# EAGLE board io_board (EAGLE 7.2.0)
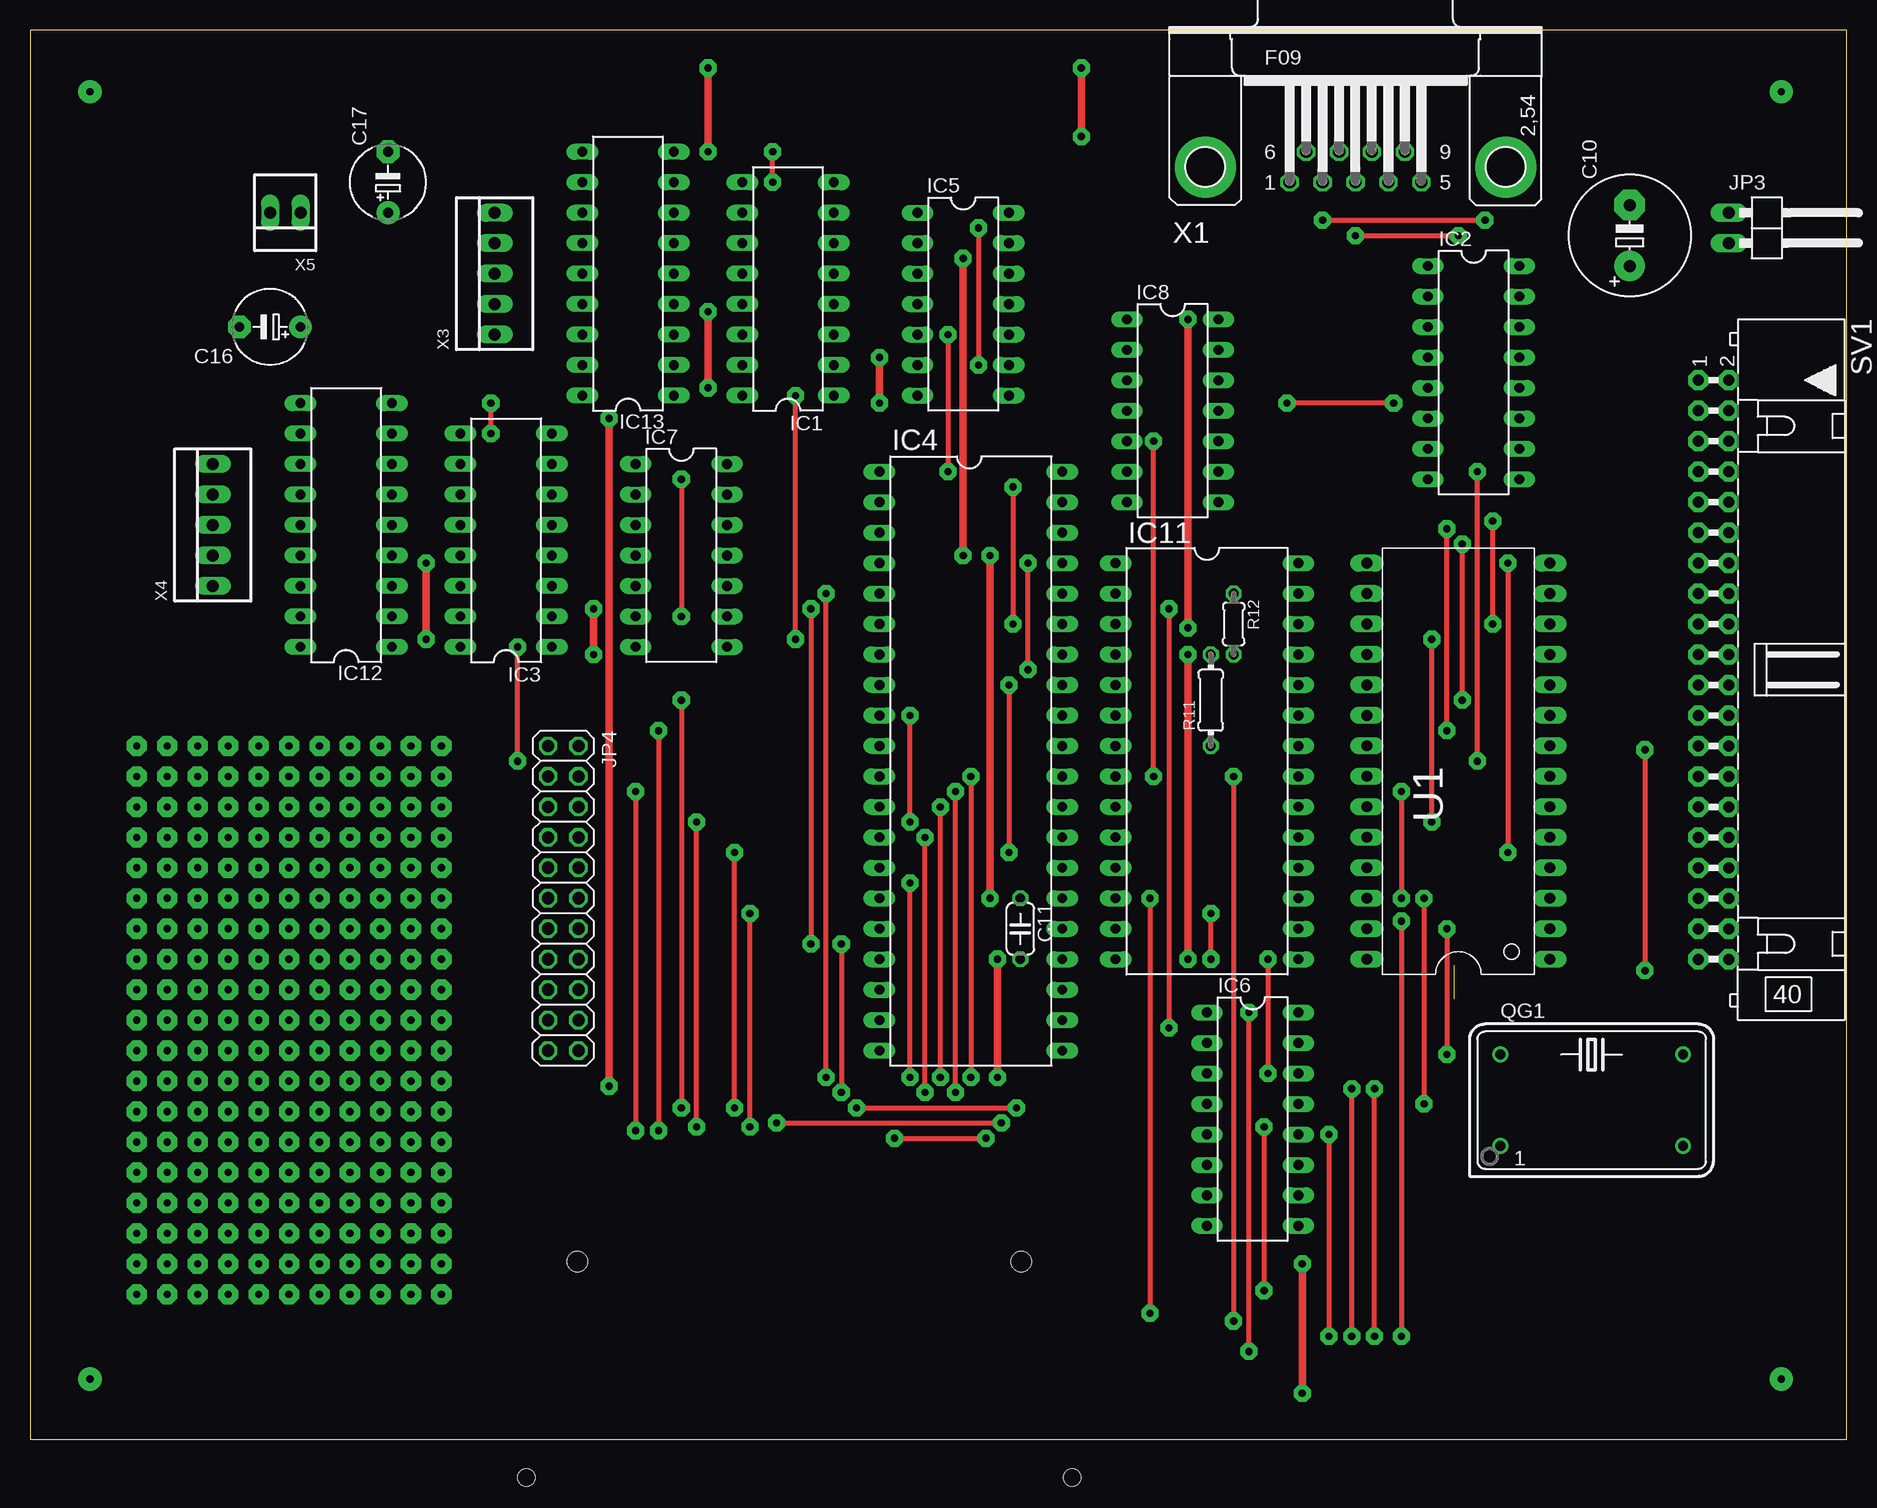
[diagram p0: board, top side]
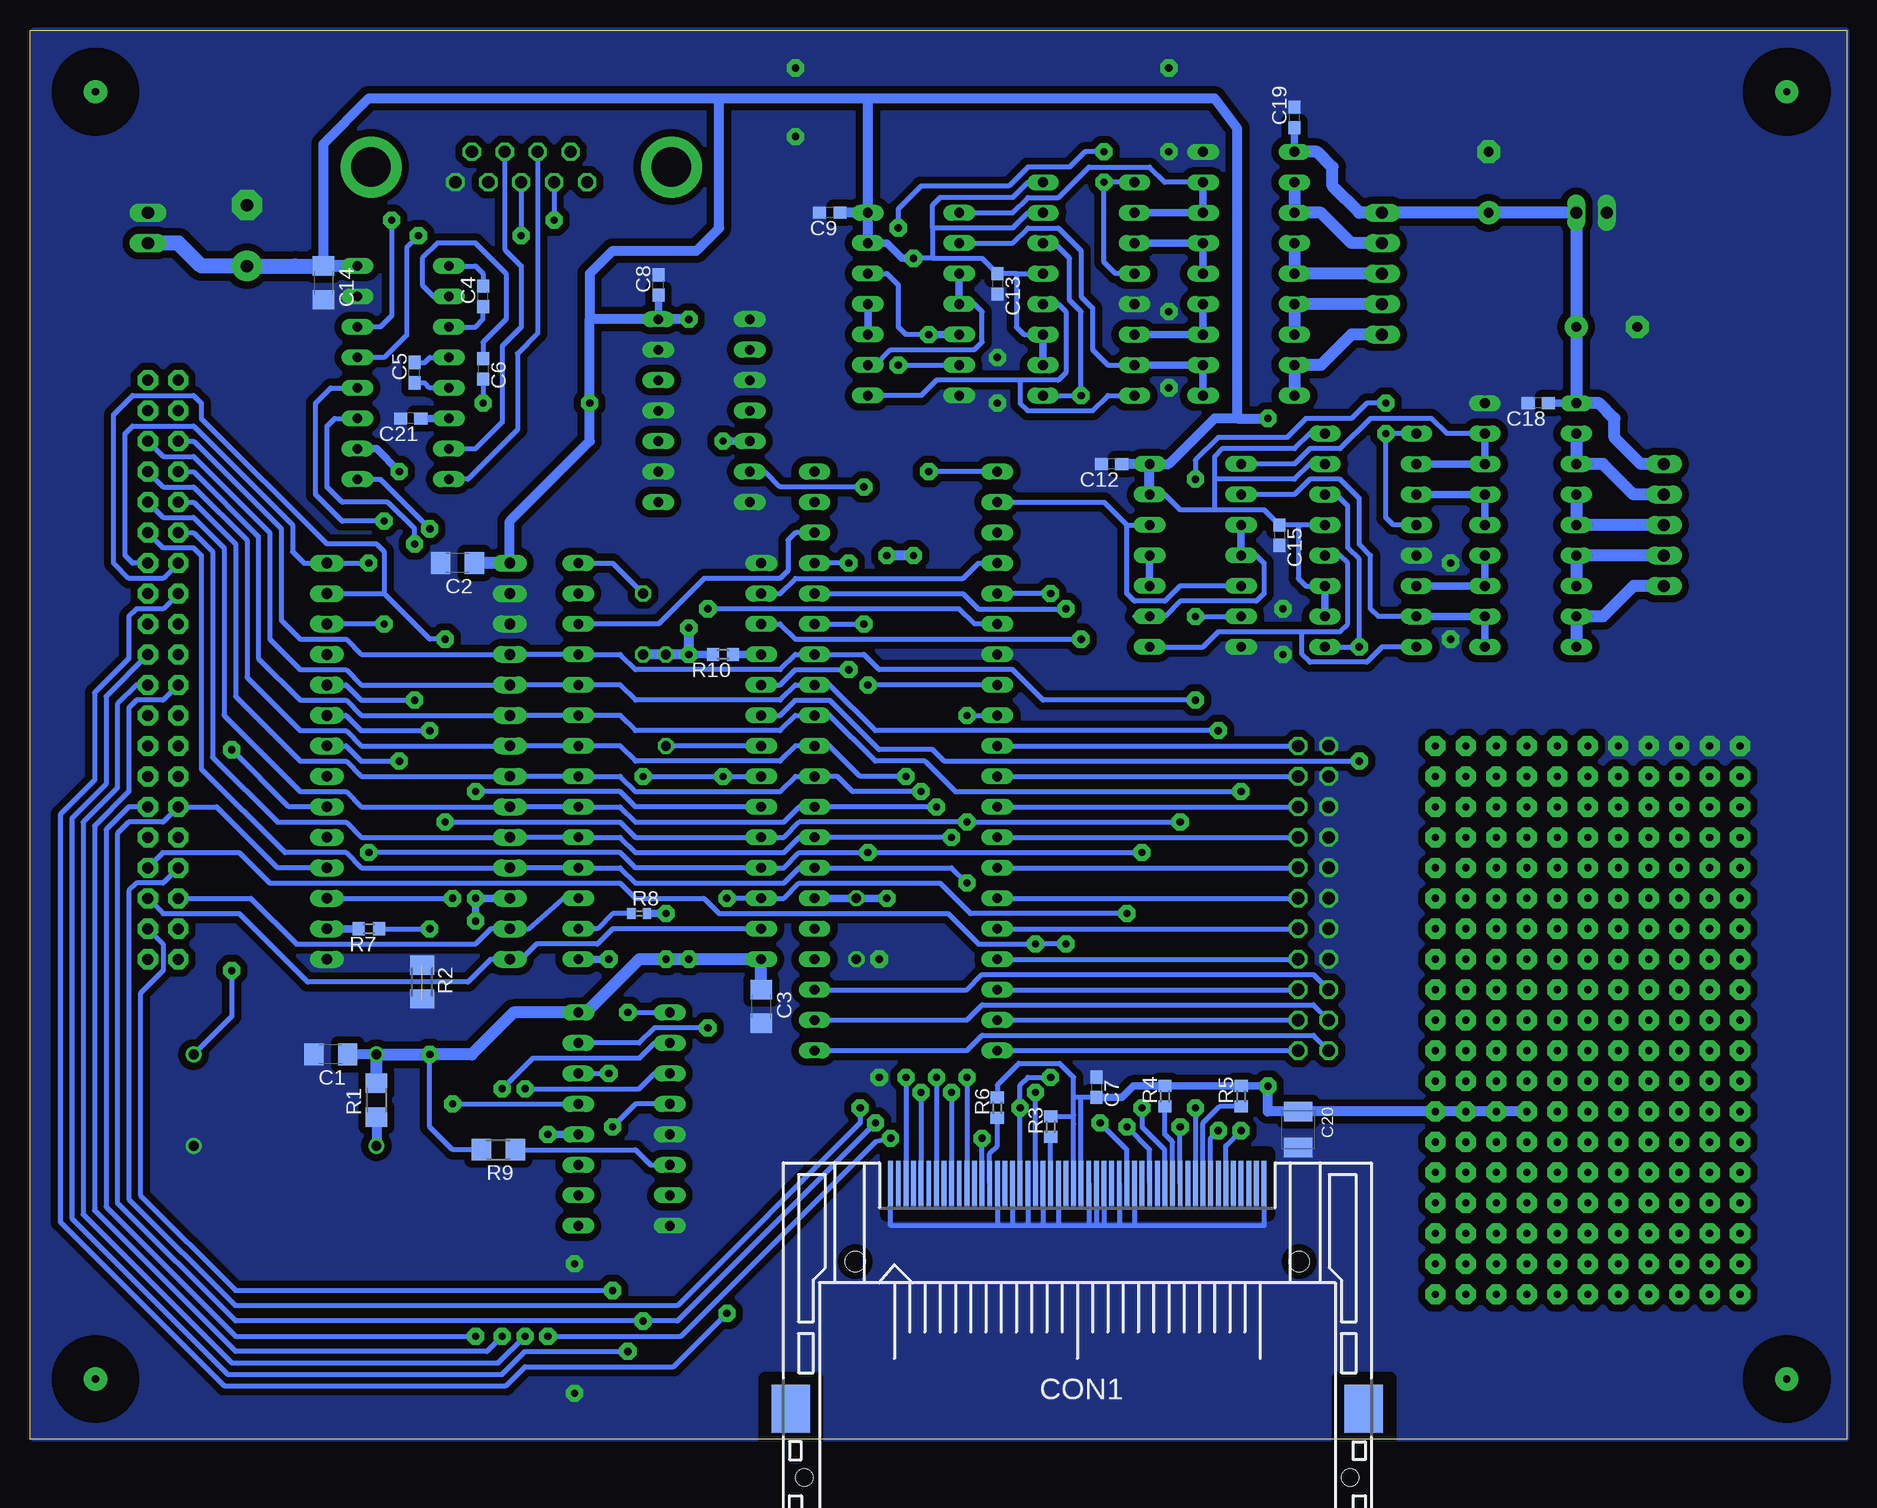
[diagram p1: board, bottom side, seen from below]

Size 151.44 x 117.47 mm. Coordinates in mm from the lower left corner, seen from the top.
Outline: 0,0 151.44,0 151.44,117.47 0,117.47 0,0
Copper layers (1*16): Top 0.035mm / dielectric 1.5mm / Bottom 0.035mm
Design rules "default *": minimum track width 10mil, minimum drill 24mil, track to track 8mil, track to pad 8mil, pad to pad 8mil, via to via 8mil, smd to smd 8mil, copper to edge 0mil, drill to drill 8mil, minimum pad ring 10mil, minimum via ring 8mil, stop-mask expansion 4mil, vias tented up to drill 0mil, thermal gap 10mil
bRestrict: area 2,2 to 8,8; area 2,109.3 to 8,115.4; area 142.9,2 to 149,8; area 142.9,109.3 to 149,115.4; area 48.3,18.7 to 80,23.8

## Footprints (pad centres in the part's own frame; a part is rotated, then mirrored left to right if it is on the bottom)
C1206 = smd 1.6 x 1.8: 1 -1.4,0; 2 1.4,0
C0603 = smd 1.1 x 1: 1 -0.85,0; 2 0.85,0
E5-10,5 = drill 1.016 pad 2.54: + -2.54,0 | drill 1.016 pad 2.54 octagon: - 2.54,0
C050-024X044 = drill 0.813 octagon: 1 -2.54,0; 2 2.54,0
E5-6 = drill 0.813 pad 1.905: + -2.54,0 | drill 0.813 pad 1.905 octagon: - 2.54,0
SMC_B = smd 1.6 x 2.4: + -1.5,0; - 1.5,0
MI20-50PD-SF = smd 0.41 x 3.75: 1 15.557,-18.78; 2 14.287,-18.78; 3 13.018,-18.78; 4 11.748,-18.78; 5 10.477,-18.78; 6 9.207,-18.78; 7 7.938,-18.78; 8 6.668,-18.78; 9 5.397,-18.78; 10 4.128,-18.78; 11 2.857,-18.78; 12 1.587,-18.78; 13 0.318,-18.78; 14 -0.953,-18.78; 15 -2.223,-18.78; 16 -3.493,-18.78; 17 -4.763,-18.78; 18 -6.032,-18.78; 19 -7.303,-18.78; 20 -8.572,-18.78; 21 -9.842,-18.78; 22 -11.113,-18.78; 23 -12.383,-18.78; 24 -13.652,-18.78; 25 -14.922,-18.78; 26 14.922,-18.78; 27 13.652,-18.78; 28 12.383,-18.78; 29 11.113,-18.78; 30 9.842,-18.78; 31 8.572,-18.78; 32 7.303,-18.78; 33 6.032,-18.78; 34 4.763,-18.78; 35 3.493,-18.78; 36 2.223,-18.78; 37 0.953,-18.78; 38 -0.318,-18.78; 39 -1.587,-18.78; 40 -2.857,-18.78; 41 -4.128,-18.78; 42 -5.397,-18.78; 43 -6.668,-18.78; 44 -7.938,-18.78; 45 -9.207,-18.78; 46 -10.477,-18.78; 47 -11.748,-18.78; 48 -13.018,-18.78; 49 -14.287,-18.78; 50 -15.557,-18.78 | smd 3.2 x 4: M1 -23.883,-0.005; M2 23.883,-0.005 | hole 1.676: 18.5,-12.25; -18.5,-12.25 | hole 1.422: -22.75,5.75; 22.75,5.75
DIL16 = drill 0.813 long: 1 -8.89,-3.81; 2 -6.35,-3.81; 3 -3.81,-3.81; 4 -1.27,-3.81; 5 1.27,-3.81; 6 3.81,-3.81; 7 6.35,-3.81; 8 8.89,-3.81; 9 8.89,3.81; 10 6.35,3.81; 11 3.81,3.81; 12 1.27,3.81; 13 -1.27,3.81; 14 -3.81,3.81; 15 -6.35,3.81; 16 -8.89,3.81
DIL40 = drill 0.813 long: 1 -24.13,-7.62; 2 -21.59,-7.62; 3 -19.05,-7.62; 4 -16.51,-7.62; 5 -13.97,-7.62; 6 -11.43,-7.62; 7 -8.89,-7.62; 8 -6.35,-7.62; 9 -3.81,-7.62; 10 -1.27,-7.62; 11 1.27,-7.62; 12 3.81,-7.62; 13 6.35,-7.62; 14 8.89,-7.62; 15 11.43,-7.62; 16 13.97,-7.62; 17 16.51,-7.62; 18 19.05,-7.62; 19 21.59,-7.62; 20 24.13,-7.62; 21 24.13,7.62; 22 21.59,7.62; 23 19.05,7.62; 24 16.51,7.62; 25 13.97,7.62; 26 11.43,7.62; 27 8.89,7.62; 28 6.35,7.62; 29 3.81,7.62; 30 1.27,7.62; 31 -1.27,7.62; 32 -3.81,7.62; 33 -6.35,7.62; 34 -8.89,7.62; 35 -11.43,7.62; 36 -13.97,7.62; 37 -16.51,7.62; 38 -19.05,7.62; 39 -21.59,7.62; 40 -24.13,7.62
DIL14 = drill 0.813 long: 1 -7.62,-3.81; 2 -5.08,-3.81; 3 -2.54,-3.81; 4 0,-3.81; 5 2.54,-3.81; 6 5.08,-3.81; 7 7.62,-3.81; 8 7.62,3.81; 9 5.08,3.81; 10 2.54,3.81; 11 0,3.81; 12 -2.54,3.81; 13 -5.08,3.81; 14 -7.62,3.81
DIL28 = drill 0.813 long: 1 -16.51,-7.62; 2 -13.97,-7.62; 3 -11.43,-7.62; 4 -8.89,-7.62; 5 -6.35,-7.62; 6 -3.81,-7.62; 7 -1.27,-7.62; 8 1.27,-7.62; 9 3.81,-7.62; 10 6.35,-7.62; 11 8.89,-7.62; 12 11.43,-7.62; 13 13.97,-7.62; 14 16.51,-7.62; 15 16.51,7.62; 16 13.97,7.62; 17 11.43,7.62; 18 8.89,7.62; 19 6.35,7.62; 20 3.81,7.62; 21 1.27,7.62; 22 -1.27,7.62; 23 -3.81,7.62; 24 -6.35,7.62; 25 -8.89,7.62; 26 -11.43,7.62; 27 -13.97,7.62; 28 -16.51,7.62
DIL18 = drill 0.813 long: 1 -10.16,-3.81; 2 -7.62,-3.81; 3 -5.08,-3.81; 4 -2.54,-3.81; 5 0,-3.81; 6 2.54,-3.81; 7 5.08,-3.81; 8 7.62,-3.81; 9 10.16,-3.81; 10 10.16,3.81; 11 7.62,3.81; 12 5.08,3.81; 13 2.54,3.81; 14 0,3.81; 15 -2.54,3.81; 16 -5.08,3.81; 17 -7.62,3.81; 18 -10.16,3.81
1X02/90 = drill 1.016 long: 1 -1.27,-3.81; 2 1.27,-3.81
2X11 = drill 1.016 octagon: 1 -12.7,-1.27; 2 -12.7,1.27; 3 -10.16,-1.27; 4 -10.16,1.27; 5 -7.62,-1.27; 6 -7.62,1.27; 7 -5.08,-1.27; 8 -5.08,1.27; 9 -2.54,-1.27; 10 -2.54,1.27; 11 0,-1.27; 12 0,1.27; 13 2.54,-1.27; 14 2.54,1.27; 15 5.08,-1.27; 16 5.08,1.27; 17 7.62,-1.27; 18 7.62,1.27; 19 10.16,-1.27; 20 10.16,1.27; 21 12.7,-1.27; 22 12.7,1.27
DIL14S = drill 0.813: 1 -7.62,-3.81; 7 7.62,-3.81; 8 7.62,3.81; 14 -7.62,3.81
R1206 = smd 1.6 x 1.803: 1 -1.422,0; 2 1.422,0
M1206 = smd 1.6 x 2: 1 -1.4,0; 2 1.4,0
R0603 = smd 1 x 1.1: 1 -0.85,0; 2 0.85,0
R0402 = smd 0.7 x 0.9: 1 -0.65,0; 2 0.65,0
0204/7 = drill 0.813 octagon: 1 -3.81,0; 2 3.81,0
0204/5 = drill 0.813 octagon: 1 -2.54,0; 2 2.54,0
ML40L = drill 0.914 pad 1.676 octagon: 1 -24.13,-1.27; 2 -24.13,1.27; 3 -21.59,-1.27; 4 -21.59,1.27; 5 -19.05,-1.27; 6 -19.05,1.27; 7 -16.51,-1.27; 8 -16.51,1.27; 9 -13.97,-1.27; 10 -13.97,1.27; 11 -11.43,-1.27; 12 -11.43,1.27; 13 -8.89,-1.27; 14 -8.89,1.27; 15 -6.35,-1.27; 16 -6.35,1.27; 17 -3.81,-1.27; 18 -3.81,1.27; 19 -1.27,-1.27; 20 -1.27,1.27; 21 1.27,-1.27; 22 1.27,1.27; 23 3.81,-1.27; 24 3.81,1.27; 25 6.35,-1.27; 26 6.35,1.27; 27 8.89,-1.27; 28 8.89,1.27; 29 11.43,-1.27; 30 11.43,1.27; 31 13.97,-1.27; 32 13.97,1.27; 33 16.51,-1.27; 34 16.51,1.27; 35 19.05,-1.27; 36 19.05,1.27; 37 21.59,-1.27; 38 21.59,1.27; 39 24.13,-1.27; 40 24.13,1.27
DIP-28 = drill 0.889 long: 1 -15.24,-7.62; 2 -12.7,-7.62; 3 -10.16,-7.62; 4 -7.62,-7.62; 5 -5.08,-7.62; 6 -2.54,-7.62; 7 0,-7.62; 8 2.54,-7.62; 9 5.08,-7.62; 10 7.62,-7.62; 11 10.16,-7.62; 12 12.7,-7.62; 13 15.24,-7.62; 14 17.78,-7.62; 15 17.78,7.62; 16 15.24,7.62; 17 12.7,7.62; 18 10.16,7.62; 19 7.62,7.62; 20 5.08,7.62; 21 2.54,7.62; 22 0,7.62; 23 -2.54,7.62; 24 -5.08,7.62; 25 -7.62,7.62; 26 -10.16,7.62; 27 -12.7,7.62; 28 -15.24,7.62
F09HP = drill 1.016 octagon: 1 -5.486,-1.27; 2 -2.743,-1.27; 3 0,-1.27; 4 2.743,-1.27; 5 5.486,-1.27; 6 -4.115,1.27; 7 -1.372,1.27; 8 1.372,1.27; 9 4.115,1.27 | drill 3.302 pad 5.08: G1 -12.522,0; G2 12.522,0
22-23-2051 = drill 1 long: 1 -5.08,0; 2 -2.54,0; 3 0,0; 4 2.54,0; 5 5.08,0
22-23-2021 = drill 1 long: 1 -1.27,0; 2 1.27,0

## Placement (x,y rotation side)
C1  [C1206]  126.36,32.07 180 bottom
C2  [C1206]  115.8,73.03 180 bottom
C3  [C1206]  90.49,36.07 270 bottom
C4  [C0603]  113.67,95.25 90 bottom
C5  [C0603]  119.38,88.9 90 bottom
C6  [C0603]  113.67,89.22 270 bottom
C7  [C0603]  62.55,29.32 270 bottom
C8  [C0603]  99.06,96.2 90 bottom
C9  [C0603]  84.77,102.23 180 bottom
C10  [E5-10,5]  133.35,100.33 90 top
C11  [C050-024X044]  82.55,42.55 270 top
C12  [C0603]  61.28,81.28 180 bottom
C13  [C0603]  70.8,96.3 270 bottom
C14  [C1206]  126.97,96.39 270 bottom
C15  [C0603]  47.31,75.35 270 bottom
C16  [E5-6]  20,92.71 180 top
C17  [E5-6]  29.84,104.78 90 top
C18  [C0603]  25.72,86.36 180 bottom
C19  [C0603]  46.04,110.17 90 bottom
C20  [SMC_B]  45.72,25.81 270 bottom
C21  [C0603]  119.7,85.09 180 bottom
CON1  [MI20-50PD-SF]  64.14,2.54 180 bottom
IC1  74HC76N  [DIL16]  63.18,95.89 90 top
IC2  MAX232  [DIL16]  120.33,88.9 270 top
IC3  74HC76N  [DIL16]  39.69,74.93 90 top
IC4  [DIL40]  78.42,56.52 270 top
IC5  7486N  [DIL14]  77.79,94.61 270 top
IC6  74HCT138N  [DIL16]  101.92,26.67 270 top
IC7  7486N  [DIL14]  54.29,73.66 270 top
IC8  74HCT04N  [DIL14]  95.25,85.72 270 top
IC11  [DIL28]  98.11,56.52 270 top
IC12  [DIL18]  26.35,76.2 90 top
IC13  [DIL18]  49.85,97.16 90 top
JP3  [1X02/90]  145.41,100.97 270 top
JP4  [2X11]  44.45,45.09 270 top
QG1  [DIL14S]  130.18,28.26 0 top
R1  [R1206]  122.56,28.26 90 bottom
R2  [M1206]  118.75,38.1 270 bottom
R3  [R0603]  66.36,26.04 90 bottom
R4  [R0603]  56.83,28.57 90 bottom
R5  [R0603]  50.48,28.57 90 bottom
R6  [R0603]  70.8,27.62 90 bottom
R7  [R0603]  123.19,42.55 180 bottom
R8  [R0402]  100.65,43.81 0 bottom
R9  [R1206]  112.39,24.13 180 bottom
R10  [R0603]  93.66,65.41 180 bottom
R11  [0204/7]  98.42,61.59 90 top
R12  [0204/5]  100.33,67.94 270 top
SV1  [ML40L]  140.34,64.14 270 top
U1  [DIP-28]  119.06,55.24 90 top
X1  [F09HP]  110.49,106.05 0 top
X3  22-23-2051  [22-23-2051]  38.73,97.16 90 top
X4  22-23-2051  [22-23-2051]  15.24,76.2 90 top
X5  22-23-2021  [22-23-2021]  21.27,102.23 180 top

## Library data of the parts
C1-C21 R1-R12 = rcl
CON1 = con-hirose; OC_FARNELL: unknown; OC_NEWARK: unknown
IC1 IC3 IC6 IC8 = 74xx-eu
IC2 = maxim; MF: MAXIM; MPN: MAX232ACPE+; OC_FARNELL: 9723773; OC_NEWARK: 68K4544
IC4 = micro-intel; OC_FARNELL: unknown; OC_NEWARK: unknown
IC5 IC7 = 74xx-us
IC11 = micro-motorola; OC_FARNELL: unknown; OC_NEWARK: unknown
IC12 IC13 = uln-udn
JP3 JP4 = pinhead
QG1 = crystal; OC_FARNELL: unknown; OC_NEWARK: unknown
SV1 = con-harting-ml; OC_FARNELL: unknown; OC_NEWARK: unknown
U1 = 65xxx
X1 = con-subd; OC_FARNELL: unknown; OC_NEWARK: unknown
X3 X4 = con-molex; MF: MOLEX; MPN: 22-23-2051; OC_FARNELL: 1462952; OC_NEWARK: 38C9178
X5 = con-molex; MF: MOLEX; MPN: 22-23-2021; OC_FARNELL: 1462926; OC_NEWARK: 25C3832

## Nets
8255_CS: IC4.6 IC6.15
A0: CON1.20 IC4.9 IC11.10 SV1.13 U1.13
A1: CON1.19 IC4.8 IC11.11 SV1.14 U1.14
A2: CON1.18 IC11.12 SV1.15
A3: SV1.16
A4: SV1.17
A5: SV1.18
A6: SV1.19
A7: IC6.1 SV1.20
A8: IC6.2 SV1.21
A9: IC6.3 SV1.22
A10: SV1.23
A11: SV1.24
A12: SV1.25
A13: SV1.26
A14: SV1.27
A15: SV1.28
CF_CS0: CON1.7 IC6.12
CS_0: SV1.37
CS_1: IC6.4 SV1.38
CS_2: SV1.39
CS_3: SV1.40
CS_4: SV1.32
D0: CON1.21 IC4.34 IC11.25 SV1.5 U1.18
D1: CON1.22 IC4.33 IC11.24 SV1.6 U1.19
D2: CON1.23 IC4.32 IC11.23 SV1.7 U1.20
D3: CON1.2 IC4.31 IC11.22 SV1.8 U1.21
D4: CON1.3 IC4.30 IC11.21 SV1.9 U1.22
D5: CON1.4 IC4.29 IC11.20 SV1.10 U1.23
D6: CON1.5 IC4.28 IC11.19 SV1.11 U1.24
D7: CON1.6 IC4.27 IC11.18 SV1.12 U1.25
DIR1: IC4.1 IC5.5 IC5.12
DIR2: IC4.2 IC7.5 IC7.12
FI2: IC11.17 SV1.35 U1.27
GATE1: IC4.38 IC11.26
GATE2: IC4.4 IC11.2
GATE3: IC4.37 IC11.5
GND: C1.2 C2.2 C3.2 C7.1 C8.2 C9.2 C10.- C11.2 C12.2 C13.2 C14.2 C15.2 C16.- C17.- C18.2 C19.2 C20.- C21.2 CON1.1 CON1.8 CON1.9 CON1.10 CON1.11 CON1.12 CON1.14 CON1.15 CON1.16 CON1.17 CON1.39 CON1.50 IC1.13 IC2.15 IC3.13 IC4.7 IC5.7 IC6.5 IC6.8 IC7.7 IC8.1 IC8.3 IC8.7 IC8.9 IC8.11 IC8.13 IC11.1 IC12.9 IC13.9 JP3.1 JP4.1 JP4.3 JP4.5 JP4.7 JP4.9 JP4.11 JP4.13 JP4.15 QG1.7 R2.1 R2.2 U1.1 U1.16 U1.17 X1.5 X5.2
IRQ: IC11.9 SV1.30 U1.26
MOT1_PHASE1: IC1.15 IC5.2 IC13.1 IC13.2
MOT1_PHASE2: IC1.14 IC13.3 IC13.4
MOT1_PHASE3: IC1.11 IC13.5 IC13.6
MOT1_PHASE4: IC1.10 IC5.1 IC13.7 IC13.8
MOT1_PHASE5: IC3.15 IC7.2 IC12.1 IC12.2
MOT1_PHASE6: IC3.14 IC12.3 IC12.4
MOT1_PHASE7: IC3.11 IC12.5 IC12.6
MOT1_PHASE8: IC3.10 IC7.1 IC12.7 IC12.8
N$1: IC2.11 U1.10
N$2: IC2.10 U1.8
N$3: IC2.12 U1.12
N$4: IC2.9 U1.9
N$5: QG1.1 R1.1
N$6: IC2.13 X1.3
N$7: IC2.7 X1.8
N$8: IC2.8 X1.7
N$9: C4.2 IC2.1
N$10: C5.2 IC2.4
N$11: C5.1 IC2.5
N$12: C4.1 IC2.3
N$13: C6.1 IC2.2
N$14: C21.1 IC2.6
N$15: CON1.32 R6.1
N$16: IC2.14 X1.2
N$17: R7.2 U1.2
N$18: IC6.6 R9.1
N$19: CON1.44 R4.1
N$20: CON1.36 R3.1
N$21: CON1.46 R5.1
N$22: IC1.4 IC1.16 IC5.8
N$26: IC5.10 IC5.11
N$27: IC5.3 IC5.4 IC5.9
N$28: IC1.9 IC1.12 IC5.6
N$29: IC13.17 IC13.18 X3.1
N$30: IC13.15 IC13.16 X3.2
N$31: IC13.13 IC13.14 X3.3
N$32: IC13.11 IC13.12 X3.4
N$33: IC7.10 IC7.11
N$34: IC7.3 IC7.4 IC7.9
N$35: IC3.4 IC3.16 IC7.8
N$36: IC3.9 IC3.12 IC7.6
N$38: IC12.17 IC12.18 X4.1
N$39: IC12.15 IC12.16 X4.2
N$40: IC12.13 IC12.14 X4.3
N$41: IC12.11 IC12.12 X4.4
N$42: IC11.16 R8.1
N$252: IC11.4 R10.1
N$253: IC11.7 R11.1
N$255: IC11.28 R12.1
NMI: SV1.31
OUT_1: SV1.1
OUT_2: SV1.2
OUT_3: SV1.3
OUT_4: SV1.4
PA1: IC4.3
PA5: IC4.39
PB0: IC4.18 JP4.18
PB1: IC4.19 JP4.20
PB2: IC4.20 JP4.22
PB3: IC4.21 JP4.21
PB4: IC4.22 JP4.19
PB5: IC4.23 JP4.17
PB6: IC4.24
PB7: IC4.25
PC0: IC4.14 JP4.10
PC1: IC4.15 JP4.12
PC2: IC4.16 JP4.14
PC3: IC4.17 JP4.16
PC4: IC4.13 JP4.8
PC5: IC4.12 JP4.6
PC6: IC4.11 JP4.4
PC7: IC4.10 JP4.2
RD: CON1.34 IC4.5 SV1.33
RST: CON1.41 IC8.5 IC11.8 SV1.29 U1.4
RST_INV: IC4.35 IC8.6
RW: IC11.13 SV1.36 U1.28
STEP1: IC1.1 IC1.6 IC11.3
STEP2: IC3.1 IC3.6 IC11.6
TIMER_CS: IC6.14 IC11.15
UART_CLK: QG1.8 U1.6
UART_CS: IC6.13 U1.3
VCC: C1.1 C2.1 C3.1 C6.2 C7.2 C8.1 C9.1 C10.+ C11.1 C12.1 C13.1 C14.1 C15.1 C20.+ CON1.13 CON1.38 IC1.2 IC1.3 IC1.5 IC1.7 IC1.8 IC2.16 IC3.2 IC3.3 IC3.5 IC3.7 IC3.8 IC4.26 IC5.13 IC5.14 IC6.16 IC7.13 IC7.14 IC8.14 IC11.14 JP3.2 QG1.14 R1.2 R3.2 R4.2 R5.2 R6.2 R7.1 R8.2 R9.2 R10.2 R11.2 R12.2 U1.15
VMOT: C16.+ C17.+ C18.1 C19.1 IC12.10 IC13.10 X3.5 X4.5 X5.1
WR: CON1.35 IC4.36 SV1.34

## Tracks (layer width: path | path; a pad name or v marks a point on that pad's centre or on a via)
8255_CS  (via drill 0.6 pad 1.42)
  Top 0.406: v94.93,69.22 v94.93,34.29
  Bottom 0.406: IC4.6 72.71,67.94 73.98,69.22 v94.93,69.22 | v94.93,34.29 99.38,34.29 100.65,33.02 IC6.15
A0  (via drill 0.6 pad 1.42)
  Top 0.406: v116.84,51.44 v116.84,66.67 | v55.56,26.04 v55.56,51.44 | v73.34,51.44 v73.34,60.33
  Bottom 0.406: U1.13 121.92,70.48 | SV1.13 140.34,71.75 143.19,71.75 144.46,73.03 144.46,85.41 142.88,87 137.79,87 137.16,86.36 137.16,85.09 126.68,74.61 122.56,74.61 121.92,73.98 121.92,70.48 | 121.92,70.48 118.11,66.67 v116.84,66.67 | v116.84,51.44 102.23,51.44 100.97,50.16 IC11.10 88.58,50.16 87.31,51.44 v73.34,51.44 v55.56,51.44 | CON1.20 v55.56,26.04 | v73.34,60.33 IC4.9
A1  (via drill 0.6 pad 1.42)
  Top 0.406: v123.19,73.03 v123.19,48.9 | v81.6,62.87 v81.6,48.9 | v58.74,27.62 v58.74,48.9
  Bottom 0.406: SV1.14 142.88,73.03 143.51,73.66 143.51,83.82 142.88,84.45 137.79,84.45 129.54,76.2 129.54,73.98 128.59,73.03 U1.14 v123.19,73.03 | v123.19,48.9 102.23,48.9 100.97,47.62 IC11.11 88.58,47.62 87.31,48.9 v81.6,48.9 v58.74,48.9 | CON1.19 56.83,24.13 58.74,26.04 v58.74,27.62 | IC4.8 v81.6,62.87
A2  (via drill 0.6 pad 1.42)
  Top 0.406: v93.34,45.09 v93.34,10.48 | v60.01,26.04 v60.01,43.81
  Bottom 0.406: v93.34,45.09 IC11.12 88.58,45.09 87.31,46.35 75.56,46.35 73.03,43.81 v60.01,43.81 | SV1.15 140.34,69.22 142.56,69.22 143.19,68.58 143.19,65.09 146.05,62.23 146.05,54.93 148.91,52.07 148.91,18.1 135.25,4.45 111.76,4.45 110.17,6.03 97.79,6.03 v93.34,10.48 | CON1.18 58.1,24.13 v60.01,26.04
A7  (via drill 0.6 pad 1.42)
  Top 0.406: v101.6,7.3 v101.6,35.56
  Bottom 0.406: SV1.20 145.1,61.91 145.1,54.61 147.96,51.75 147.96,18.41 134.94,5.4 112.08,5.4 110.17,7.3 v101.6,7.3 | v101.6,35.56 IC6.1
A8  (via drill 0.6 pad 1.42)
  Top 0.406: v112.08,8.57 v112.08,29.21
  Bottom 0.406: SV1.21 140.34,61.59 142.56,61.59 143.19,60.96 143.19,53.98 146.05,51.12 146.05,19.05 134.3,7.3 113.35,7.3 v112.08,8.57 | IC6.2 99.38,33.02 100.65,31.75 109.54,31.75 v112.08,29.21
A9  (via drill 0.6 pad 1.42)
  Top 0.406: v110.17,8.57 v110.17,29.21
  Bottom 0.406: SV1.22 142.56,62.87 144.15,61.28 144.15,54.29 147,51.44 147,18.73 134.62,6.35 112.39,6.35 v110.17,8.57 | v110.17,29.21 100.65,29.21 99.38,30.48 IC6.3
CF_CS0  (via drill 0.6 pad 1.42)
  Top 0.406: v72.07,25.08 v79.69,25.08 | v108.27,25.4 v108.27,8.57
  Bottom 0.406: CON1.7 v72.07,25.08 | v108.27,8.57 97.16,8.57 80.96,24.77 v79.69,25.08
  Bottom 0.61: IC6.12 v108.27,25.4
CS_1  (via drill 0.6 pad 1.42)
  Top 0.406: v102.87,26.04 v102.87,12.38
  Bottom 0.406: SV1.38 140.34,41.27 140.34,39.05 142.24,37.15 142.24,20.32 134.3,12.38 v102.87,12.38 | IC6.4 100.97,27.94 v102.87,26.04
D0  (via drill 0.6 pad 1.42)
  Top 0.406: v54.29,61.59 v54.29,27.62
  Bottom 0.406: SV1.5 137.79,83.19 130.49,75.88 130.49,68.26 128.91,66.67 125.09,66.67 123.83,65.41 U1.18 IC11.25 102.23,65.41 100.97,64.14 88.9,64.14 87.63,65.41 IC4.34 81.92,65.41 80.64,64.14 69.53,64.14 66.99,61.59 v54.29,61.59 | v54.29,27.62 CON1.21
D1  (via drill 0.6 pad 1.42)
  Top 0.406: v52.39,59.05 v52.39,25.72
  Bottom 0.406: SV1.6 140.34,81.92 137.79,81.92 131.44,75.56 131.44,66.67 128.91,64.14 125.09,64.14 123.83,62.87 U1.19 IC11.24 102.23,62.87 100.97,61.59 88.9,61.59 87.63,62.87 IC4.33 84.77,62.87 80.96,59.05 v52.39,59.05 | CON1.22 53.02,25.08 v52.39,25.72
D2  (via drill 0.6 pad 1.42)
  Top 0.406: v50.48,53.98 v50.48,25.72
  Bottom 0.406: SV1.7 137.79,80.64 132.4,75.25 132.4,65.09 128.91,61.59 125.09,61.59 123.83,60.33 U1.20 IC11.23 102.23,60.33 100.97,59.05 88.9,59.05 87.63,60.33 IC4.32 84.77,60.33 80.96,56.52 76.83,56.52 74.3,53.98 v50.48,53.98 | CON1.23 51.75,24.45 v50.48,25.72
D3  (via drill 0.6 pad 1.42)
  Top 0.406: v78.42,55.24 v78.42,30.16
  Bottom 0.406: SV1.8 140.34,79.38 137.79,79.38 133.35,74.93 133.35,63.5 128.91,59.05 125.09,59.05 123.83,57.78 U1.21 IC11.22 102.23,57.78 100.97,56.52 88.9,56.52 87.63,57.78 IC4.31 84.77,57.78 82.23,55.24 v78.42,55.24 | v78.42,30.16 CON1.2
D4  (via drill 0.6 pad 1.42)
  Top 0.406: v77.15,28.89 v77.15,53.98
  Bottom 0.406: SV1.9 137.79,78.11 134.3,74.61 134.3,61.91 128.91,56.52 125.09,56.52 123.83,55.24 U1.22 IC11.21 102.23,55.24 100.97,53.98 88.9,53.98 87.63,55.24 IC4.30 84.14,55.24 82.87,53.98 v77.15,53.98 | v77.15,28.89 CON1.3
D5  (via drill 0.6 pad 1.42)
  Top 0.406: v75.88,30.16 v75.88,52.7
  Bottom 0.406: SV1.10 140.34,76.83 137.79,76.83 135.25,74.3 135.25,60.33 128.91,53.98 125.09,53.98 123.83,52.7 U1.23 IC11.20 102.23,52.7 100.97,51.44 88.58,51.44 87.31,52.7 IC4.29 v75.88,52.7 | v75.88,30.16 CON1.4
D6  (via drill 0.6 pad 1.42)
  Top 0.406: v74.61,28.89 v74.61,50.16
  Bottom 0.406: SV1.11 137.79,75.56 136.21,73.98 136.21,56.83 130.81,51.44 125.09,51.44 123.83,50.16 U1.24 IC11.19 102.23,50.16 100.97,48.9 88.58,48.9 87.31,50.16 IC4.28 v74.61,50.16 | v74.61,28.89 CON1.5
D7  (via drill 0.6 pad 1.42)
  Top 0.406: v73.34,30.16 v73.34,46.35
  Bottom 0.406: SV1.12 140.34,74.3 137.79,74.3 137.16,73.66 137.16,55.88 130.18,48.9 125.09,48.9 123.83,47.62 U1.25 IC11.18 102.23,47.62 100.97,46.35 88.58,46.35 87.31,47.62 IC4.27 74.61,47.62 v73.34,46.35 | v73.34,30.16 CON1.6
DIR1  (via drill 0.6 pad 1.42)
  Top 0.406: v76.52,92.08 v76.52,80.64
  Bottom 0.406: IC5.12 80.01,97.16 79.06,96.2 79.06,92.71 78.42,92.08 v76.52,92.08 | IC4.1 v76.52,80.64
  Bottom 0.61: IC5.5 v76.52,92.08
DIR2
  Bottom 0.406: IC7.5 55.56,71.12 56.83,69.85 59.37,69.85 60.01,70.48 60.01,76.2 | 60.01,76.2 IC7.12 | IC4.2 61.91,78.11 60.01,76.2
FI2
  Bottom 0.406: SV1.35 133.03,45.09 129.22,41.27 114.3,41.27 113.03,42.55 U1.27 109.86,42.55 107,45.09 IC11.17
GATE1
  Bottom 0.406: IC4.38 87.63,75.56 88.27,74.93 88.27,72.39 88.9,71.75 95.25,71.75 99.06,67.94 IC11.26
GATE2
  Bottom 0.406: IC11.2 88.9,70.48 87.63,71.75 73.66,71.75 72.39,73.03 IC4.4
GATE3  (via drill 0.6 pad 1.42)
  Top 0.406: v83.19,64.14 v83.19,73.03
  Bottom 0.406: IC11.5 88.9,62.87 87.63,64.14 v83.19,64.14 | IC4.37 v83.19,73.03 83.17,73.01
GND  (via drill 0.6 pad 1.42, 0.6 pad 1.68)  (1 unrouted)
  Top 0.61: v87.63,114.3 v87.63,108.58 | v106.05,14.61 v106.05,3.81 | v70.8,86.36 v70.8,90.17 | v46.99,69.22 v46.99,65.41 | v33.02,73.03 v33.02,66.67 | v56.52,93.98 v56.52,87.63 | v56.52,107.31 v56.52,114.3 | v80.64,40.01 v80.64,30.16
  Bottom 0.406: CON1.50 48.58,17.78 59.37,17.78 | 59.37,17.78 60.64,17.78 | 60.64,17.78 61.91,17.78 | 61.91,17.78 62.55,17.78 | 62.55,17.78 63.18,17.78 | 63.18,17.78 65.72,17.78 | 65.72,17.78 66.99,17.78 | 66.99,17.78 68.26,17.78 | 68.26,17.78 69.53,17.78 | 69.53,17.78 70.8,17.78 | 70.8,17.78 79.69,17.78 CON1.1 | CON1.8 70.8,17.78 | CON1.9 69.53,17.78 | CON1.11 66.99,17.78 | CON1.10 68.26,17.78 | CON1.12 65.72,17.78 | CON1.14 63.18,17.78 | CON1.39 62.55,17.78 | CON1.15 61.91,17.78 | CON1.17 59.37,17.78 | CON1.16 60.64,17.78
  other vias: 19.05,57.78 16.51,57.78 13.97,57.78 11.43,57.78 8.89,57.78
  pour Bottom (isolate 0.61, no thermals): 0,117.47 0,0 151.13,0 151.13,117.47
IRQ  (via drill 0.6 pad 1.42)
  Top 0.406: v114.3,43.18 v114.3,8.57 | v114.3,53.98 v114.3,45.09
  Bottom 0.406: SV1.30 143.19,52.7 145.1,50.8 145.1,19.37 134.3,8.57 v114.3,8.57 | IC11.9 100.97,52.7 102.23,53.98 v114.3,53.98
  Bottom 0.61: U1.26 v114.3,45.09 v114.3,43.18
MOT1_PHASE1
  Bottom 0.406: IC5.2 69.53,99.69 68.26,100.97 65.72,100.97 63.82,99.06 63.82,95.25 62.87,94.3 62.87,90.81 61.59,89.53 IC1.15
  Bottom 0.61: IC13.1 IC13.2 IC1.15
MOT1_PHASE2
  Bottom 0.61: IC13.4 IC13.3 IC1.14
MOT1_PHASE3
  Bottom 0.61: IC13.5 IC13.6 IC1.11
MOT1_PHASE4
  Bottom 0.406: IC5.1 69.53,102.23 68.26,103.5 65.72,103.5 63.18,106.05 58.1,106.05 56.83,104.78 IC13.8
  Bottom 0.61: IC13.8 IC13.7 IC1.10
MOT1_PHASE5
  Bottom 0.406: IC3.15 39.05,68.58 39.69,69.22 39.69,73.66 40.64,74.61 40.64,78.42 42.23,80.01 44.77,80.01 46.04,78.74 IC7.2
  Bottom 0.61: IC12.1 IC12.2 IC3.15
MOT1_PHASE6
  Bottom 0.61: IC12.4 IC12.3 IC3.14
MOT1_PHASE7
  Bottom 0.61: IC12.5 IC12.6 IC3.11
MOT1_PHASE8
  Bottom 0.406: IC7.1 46.04,81.28 44.77,82.55 42.23,82.55 39.69,85.09 34.61,85.09 33.34,83.82 IC12.8
  Bottom 0.61: IC12.8 IC12.7 IC3.10
N$1  (via drill 0.6 pad 1.42)
  Top 0.406: v119.38,61.59 v119.38,74.61
  Bottom 0.406: U1.10 125.09,62.87 123.83,61.59 v119.38,61.59 | IC2.11 126.05,85.09 126.68,84.45 126.68,79.38 125.41,78.11 121.6,78.11 119.38,75.88 v119.38,74.61
N$2  (via drill 0.6 pad 1.42)
  Top 0.406: v120.65,56.52 v120.65,80.64
  Bottom 0.406: U1.8 125.09,57.78 123.83,56.52 v120.65,56.52
  Bottom 0.61: IC2.10 122.56,82.55 v120.65,80.64
N$3  (via drill 0.6 pad 1.42)
  Top 0.406: v121.92,67.94 v121.92,76.52
  Bottom 0.406: v121.92,67.94 U1.12 | v121.92,76.52 125.41,76.52 127.64,78.74 127.64,86.36 126.36,87.63 IC2.12
N$4  (via drill 0.6 pad 1.42)
  Top 0.406: v118.11,59.05 v118.11,75.88
  Bottom 0.406: U1.9 125.09,60.33 123.83,59.05 v118.11,59.05 | IC2.9 122.24,80.01 v118.11,75.88
N$5
  Bottom 0.813: R1.1 QG1.1
N$6  (via drill 0.6 pad 1.42)
  Top 0.406: v110.49,100.33 v119.06,100.33
  Bottom 0.406: X1.3 v110.49,100.33 | IC2.13 121.92,90.17 120.02,92.08 120.02,99.38 v119.06,100.33
N$7
  Bottom 0.406: IC2.7 114.3,82.55 112.08,84.77 112.08,91.12 110.49,92.71 110.49,97.79 111.86,99.16 X1.8
N$8
  Bottom 0.406: X1.7 109.12,92.18 110.81,90.49 110.81,84.14 114.94,80.01 IC2.8
N$9
  Bottom 0.406: IC2.1 114.3,97.79 113.67,97.16 C4.2
N$10
  Bottom 0.406: C5.2 118.53,89.75 118.11,90.17 IC2.4
N$11
  Bottom 0.406: IC2.5 118.11,87.63 118.53,88.05 C5.1
N$12
  Bottom 0.406: IC2.3 114.3,92.71 113.67,93.34 C4.1
N$13
  Bottom 0.406: IC2.2 117.79,95.25 118.75,96.2 118.75,98.42 117.47,99.69 114.3,99.69 111.76,97.16 111.76,93.34 113.67,91.44 C6.1
N$14
  Bottom 0.61: IC2.6 C21.1
N$15
  Bottom 0.406: CON1.32 71.44,23.81 70.8,24.45 R6.1
N$16  (via drill 0.6 pad 1.42)
  Top 0.406: v107.75,101.6 v121.28,101.6
  Bottom 0.406: X1.2 v107.75,101.6 | v121.28,101.6 121.28,93.66 122.24,92.71 IC2.14
N$17
  Bottom 0.61: U1.2 R7.2
N$18
  Bottom 0.406: R9.1 100.97,24.13 99.69,22.86 IC6.6
N$19
  Bottom 0.406: CON1.44 56.2,24.77 56.83,25.4 R4.1
N$20
  Bottom 0.406: CON1.36 R3.1
N$21
  Bottom 0.406: CON1.46 53.66,26.35 52.28,27.73 R5.1
N$22
  Bottom 0.406: IC1.4 65.72,94.61 65.09,93.98 65.09,88.9 65.72,88.27 68.9,88.27 | 68.9,88.27 68.9,86.36 68.26,85.72 62.87,85.72 61.59,87 IC1.16 | 68.9,88.27 75.88,88.27 77.15,87 IC5.8
N$23  (via drill 0.6 pad 1.93)
  other vias: 5,112.31
N$24  (via drill 0.6 pad 1.93)
  other vias: 145.97,5
N$25  (via drill 0.6 pad 1.93)
  other vias: 145.97,112.31
N$26
  Bottom 0.61: IC5.10 IC5.11
N$27
  Bottom 0.406: IC5.9 80.96,89.53 79.69,90.81 72.71,90.81 72.07,91.44 72.07,93.98 72.71,94.61 IC5.4
  Bottom 0.61: IC5.3 IC5.4
N$28  (via drill 0.6 pad 1.42)
  Top 0.406: v61.91,104.78 v61.91,107.31 | v79.06,100.97 v79.06,89.53
  Bottom 0.406: IC1.12 60.96,97.16 61.91,98.11 v61.91,104.78 IC1.9 | v61.91,107.31 63.5,107.31 64.77,106.05 68.26,106.05 69.85,104.46 77.15,104.46 79.06,102.55 v79.06,100.97 | v79.06,89.53 IC5.6
N$29
  Bottom 1.016: IC13.18 IC13.17 43.81,89.53 41.27,92.08 X3.1
N$30
  Bottom 1.016: IC13.16 IC13.15 X3.2
N$31
  Bottom 1.016: IC13.13 IC13.14 X3.3
N$32
  Bottom 1.016: IC13.11 IC13.12 43.81,102.23 41.27,99.69 X3.4
N$33
  Bottom 0.61: IC7.10 IC7.11
N$34
  Bottom 0.406: 59.37,68.58 IC7.9 56.83,68.58 55.56,69.85 49.21,69.85 48.58,70.48 48.58,73.03 49.21,73.66 IC7.4
  Bottom 0.61: IC7.4 IC7.3
N$35
  Bottom 0.406: IC7.8 53.66,66.04 52.39,67.31 45.4,67.31 | 45.4,67.31 42.23,67.31 41.59,67.94 41.59,73.03 42.23,73.66 IC3.4 | IC3.16 38.73,66.04 40.01,64.77 44.77,64.77 45.4,65.41 45.4,67.31
N$36  (via drill 0.6 pad 1.42)
  Top 0.406: v38.42,83.82 v38.42,86.36 | v54.29,80.01 v54.29,68.58
  Bottom 0.406: IC3.12 37.78,76.2 38.42,76.83 v38.42,83.82 IC3.9 | v38.42,86.36 40.01,86.36 41.27,85.09 45.09,85.09 46.67,83.5 52.39,83.5 54.29,81.6 v54.29,80.01 | v54.29,68.58 IC7.6
N$37  (via drill 0.6 pad 1.93)
  other vias: 5,5
N$38
  Bottom 1.016: IC12.18 IC12.17 20.32,68.58 17.78,71.12 X4.1
N$39
  Bottom 1.016: IC12.16 IC12.15 X4.2
N$40
  Bottom 1.016: IC12.13 IC12.14 X4.3
N$41
  Bottom 1.016: IC12.11 IC12.12 20.32,81.28 17.78,78.74 X4.4
N$42
  Bottom 0.406: R8.1 102.87,43.81 104.14,42.55 IC11.16
N$43  (via drill 0.6 pad 1.68)
  other vias: 34.29,57.78
N$44  (via drill 0.6 pad 1.68)
  other vias: 34.29,55.24
N$45  (via drill 0.6 pad 1.68)
  other vias: 34.29,52.7
N$46  (via drill 0.6 pad 1.68)
  other vias: 34.29,50.16
N$47  (via drill 0.6 pad 1.68)
  other vias: 34.29,47.62
N$48  (via drill 0.6 pad 1.68)
  other vias: 34.29,45.09
N$49  (via drill 0.6 pad 1.68)
  other vias: 34.29,42.55
N$50  (via drill 0.6 pad 1.68)
  other vias: 34.29,40.01
N$51  (via drill 0.6 pad 1.68)
  other vias: 34.29,37.47
N$52  (via drill 0.6 pad 1.68)
  other vias: 34.29,34.92
N$53  (via drill 0.6 pad 1.68)
  other vias: 34.29,32.38
N$56  (via drill 0.6 pad 1.68)
  other vias: 34.29,24.77
N$57  (via drill 0.6 pad 1.68)
  other vias: 34.29,22.23
N$58  (via drill 0.6 pad 1.68)
  other vias: 34.29,19.68
N$59  (via drill 0.6 pad 1.68)
  other vias: 34.29,17.14
N$60  (via drill 0.6 pad 1.68)
  other vias: 34.29,14.61
N$61  (via drill 0.6 pad 1.68)
  other vias: 34.29,12.06
N$63  (via drill 0.6 pad 1.68)
  other vias: 13.97,55.24
N$64  (via drill 0.6 pad 1.68)
  other vias: 31.75,57.78
N$65  (via drill 0.6 pad 1.68)
  other vias: 31.75,55.24
N$66  (via drill 0.6 pad 1.68)
  other vias: 31.75,52.7
N$67  (via drill 0.6 pad 1.68)
  other vias: 31.75,50.16
N$68  (via drill 0.6 pad 1.68)
  other vias: 31.75,47.62
N$69  (via drill 0.6 pad 1.68)
  other vias: 31.75,45.09
N$70  (via drill 0.6 pad 1.68)
  other vias: 31.75,42.55
N$71  (via drill 0.6 pad 1.68)
  other vias: 31.75,40.01
N$72  (via drill 0.6 pad 1.68)
  other vias: 31.75,37.47
N$73  (via drill 0.6 pad 1.68)
  other vias: 31.75,34.92
N$74  (via drill 0.6 pad 1.68)
  other vias: 31.75,32.38
N$77  (via drill 0.6 pad 1.68)
  other vias: 31.75,24.77
N$78  (via drill 0.6 pad 1.68)
  other vias: 31.75,22.23
N$79  (via drill 0.6 pad 1.68)
  other vias: 31.75,19.68
N$80  (via drill 0.6 pad 1.68)
  other vias: 31.75,17.14
N$81  (via drill 0.6 pad 1.68)
  other vias: 31.75,14.61
N$82  (via drill 0.6 pad 1.68)
  other vias: 31.75,12.06
N$83  (via drill 0.6 pad 1.68)
  other vias: 13.97,52.7
N$84  (via drill 0.6 pad 1.68)
  other vias: 13.97,50.16
N$85  (via drill 0.6 pad 1.68)
  other vias: 29.21,57.78
N$86  (via drill 0.6 pad 1.68)
  other vias: 29.21,55.24
N$87  (via drill 0.6 pad 1.68)
  other vias: 29.21,52.7
N$88  (via drill 0.6 pad 1.68)
  other vias: 29.21,50.16
N$89  (via drill 0.6 pad 1.68)
  other vias: 29.21,47.62
N$90  (via drill 0.6 pad 1.68)
  other vias: 29.21,45.09
N$91  (via drill 0.6 pad 1.68)
  other vias: 29.21,42.55
N$92  (via drill 0.6 pad 1.68)
  other vias: 29.21,40.01
N$93  (via drill 0.6 pad 1.68)
  other vias: 29.21,37.47
N$94  (via drill 0.6 pad 1.68)
  other vias: 29.21,34.92
N$95  (via drill 0.6 pad 1.68)
  other vias: 29.21,32.38
N$98  (via drill 0.6 pad 1.68)
  other vias: 29.21,24.77
N$99  (via drill 0.6 pad 1.68)
  other vias: 29.21,22.23
N$100  (via drill 0.6 pad 1.68)
  other vias: 29.21,19.68
N$101  (via drill 0.6 pad 1.68)
  other vias: 29.21,17.14
N$102  (via drill 0.6 pad 1.68)
  other vias: 29.21,14.61
N$103  (via drill 0.6 pad 1.68)
  other vias: 29.21,12.06
N$104  (via drill 0.6 pad 1.68)
  other vias: 13.97,47.62
N$105  (via drill 0.6 pad 1.68)
  other vias: 13.97,45.09
N$106  (via drill 0.6 pad 1.68)
  other vias: 26.67,57.78
N$107  (via drill 0.6 pad 1.68)
  other vias: 26.67,55.24
N$108  (via drill 0.6 pad 1.68)
  other vias: 26.67,52.7
N$109  (via drill 0.6 pad 1.68)
  other vias: 26.67,50.16
N$110  (via drill 0.6 pad 1.68)
  other vias: 26.67,47.62
N$111  (via drill 0.6 pad 1.68)
  other vias: 26.67,45.09
N$112  (via drill 0.6 pad 1.68)
  other vias: 26.67,42.55
N$113  (via drill 0.6 pad 1.68)
  other vias: 26.67,40.01
N$114  (via drill 0.6 pad 1.68)
  other vias: 26.67,37.47
N$115  (via drill 0.6 pad 1.68)
  other vias: 26.67,34.92
N$116  (via drill 0.6 pad 1.68)
  other vias: 26.67,32.38
N$119  (via drill 0.6 pad 1.68)
  other vias: 26.67,24.77
N$120  (via drill 0.6 pad 1.68)
  other vias: 26.67,22.23
N$121  (via drill 0.6 pad 1.68)
  other vias: 26.67,19.68
N$122  (via drill 0.6 pad 1.68)
  other vias: 26.67,17.14
N$123  (via drill 0.6 pad 1.68)
  other vias: 26.67,14.61
N$124  (via drill 0.6 pad 1.68)
  other vias: 26.67,12.06
N$125  (via drill 0.6 pad 1.68)
  other vias: 13.97,42.55
N$126  (via drill 0.6 pad 1.68)
  other vias: 13.97,40.01
N$127  (via drill 0.6 pad 1.68)
  other vias: 24.13,57.78
N$128  (via drill 0.6 pad 1.68)
  other vias: 24.13,55.24
N$129  (via drill 0.6 pad 1.68)
  other vias: 24.13,52.7
N$130  (via drill 0.6 pad 1.68)
  other vias: 24.13,50.16
N$131  (via drill 0.6 pad 1.68)
  other vias: 24.13,47.62
N$132  (via drill 0.6 pad 1.68)
  other vias: 24.13,45.09
N$133  (via drill 0.6 pad 1.68)
  other vias: 24.13,42.55
N$134  (via drill 0.6 pad 1.68)
  other vias: 24.13,40.01
N$135  (via drill 0.6 pad 1.68)
  other vias: 24.13,37.47
N$136  (via drill 0.6 pad 1.68)
  other vias: 24.13,34.92
N$137  (via drill 0.6 pad 1.68)
  other vias: 24.13,32.38
N$140  (via drill 0.6 pad 1.68)
  other vias: 24.13,24.77
N$141  (via drill 0.6 pad 1.68)
  other vias: 24.13,22.23
N$142  (via drill 0.6 pad 1.68)
  other vias: 24.13,19.68
N$143  (via drill 0.6 pad 1.68)
  other vias: 24.13,17.14
N$144  (via drill 0.6 pad 1.68)
  other vias: 24.13,14.61
N$145  (via drill 0.6 pad 1.68)
  other vias: 24.13,12.06
N$146  (via drill 0.6 pad 1.68)
  other vias: 13.97,37.47
N$147  (via drill 0.6 pad 1.68)
  other vias: 13.97,34.92
N$148  (via drill 0.6 pad 1.68)
  other vias: 21.59,57.78
N$149  (via drill 0.6 pad 1.68)
  other vias: 21.59,55.24
N$150  (via drill 0.6 pad 1.68)
  other vias: 21.59,52.7
N$151  (via drill 0.6 pad 1.68)
  other vias: 21.59,50.16
N$152  (via drill 0.6 pad 1.68)
  other vias: 21.59,47.62
N$153  (via drill 0.6 pad 1.68)
  other vias: 21.59,45.09
N$154  (via drill 0.6 pad 1.68)
  other vias: 21.59,42.55
N$155  (via drill 0.6 pad 1.68)
  other vias: 21.59,40.01
N$156  (via drill 0.6 pad 1.68)
  other vias: 21.59,37.47
N$157  (via drill 0.6 pad 1.68)
  other vias: 21.59,34.92
N$158  (via drill 0.6 pad 1.68)
  other vias: 21.59,32.38
N$161  (via drill 0.6 pad 1.68)
  other vias: 21.59,24.77
N$162  (via drill 0.6 pad 1.68)
  other vias: 21.59,22.23
N$163  (via drill 0.6 pad 1.68)
  other vias: 21.59,19.68
N$164  (via drill 0.6 pad 1.68)
  other vias: 21.59,17.14
N$165  (via drill 0.6 pad 1.68)
  other vias: 21.59,14.61
N$166  (via drill 0.6 pad 1.68)
  other vias: 21.59,12.06
N$167  (via drill 0.6 pad 1.68)
  other vias: 13.97,32.38
N$170  (via drill 0.6 pad 1.68)
  other vias: 19.05,55.24
N$171  (via drill 0.6 pad 1.68)
  other vias: 19.05,52.7
N$172  (via drill 0.6 pad 1.68)
  other vias: 19.05,50.16
N$173  (via drill 0.6 pad 1.68)
  other vias: 19.05,47.62
N$174  (via drill 0.6 pad 1.68)
  other vias: 19.05,45.09
N$175  (via drill 0.6 pad 1.68)
  other vias: 19.05,42.55
N$176  (via drill 0.6 pad 1.68)
  other vias: 19.05,40.01
N$177  (via drill 0.6 pad 1.68)
  other vias: 19.05,37.47
N$178  (via drill 0.6 pad 1.68)
  other vias: 19.05,34.92
N$179  (via drill 0.6 pad 1.68)
  other vias: 19.05,32.38
N$182  (via drill 0.6 pad 1.68)
  other vias: 19.05,24.77
N$183  (via drill 0.6 pad 1.68)
  other vias: 19.05,22.23
N$184  (via drill 0.6 pad 1.68)
  other vias: 19.05,19.68
N$185  (via drill 0.6 pad 1.68)
  other vias: 19.05,17.14
N$186  (via drill 0.6 pad 1.68)
  other vias: 19.05,14.61
N$187  (via drill 0.6 pad 1.68)
  other vias: 19.05,12.06
N$189  (via drill 0.6 pad 1.68)
  other vias: 13.97,24.77
N$191  (via drill 0.6 pad 1.68)
  other vias: 16.51,55.24
N$192  (via drill 0.6 pad 1.68)
  other vias: 16.51,52.7
N$193  (via drill 0.6 pad 1.68)
  other vias: 16.51,50.16
N$194  (via drill 0.6 pad 1.68)
  other vias: 16.51,47.62
N$195  (via drill 0.6 pad 1.68)
  other vias: 16.51,45.09
N$196  (via drill 0.6 pad 1.68)
  other vias: 16.51,42.55
N$197  (via drill 0.6 pad 1.68)
  other vias: 16.51,40.01
N$198  (via drill 0.6 pad 1.68)
  other vias: 16.51,37.47
N$199  (via drill 0.6 pad 1.68)
  other vias: 16.51,34.92
N$200  (via drill 0.6 pad 1.68)
  other vias: 16.51,32.38
N$203  (via drill 0.6 pad 1.68)
  other vias: 16.51,24.77
N$204  (via drill 0.6 pad 1.68)
  other vias: 16.51,22.23
N$205  (via drill 0.6 pad 1.68)
  other vias: 16.51,19.68
N$206  (via drill 0.6 pad 1.68)
  other vias: 16.51,17.14
N$207  (via drill 0.6 pad 1.68)
  other vias: 16.51,14.61
N$208  (via drill 0.6 pad 1.68)
  other vias: 16.51,12.06
N$209  (via drill 0.6 pad 1.68)
  other vias: 13.97,22.23
N$210  (via drill 0.6 pad 1.68)
  other vias: 13.97,19.68
N$211  (via drill 0.6 pad 1.68)
  other vias: 13.97,17.14
N$212  (via drill 0.6 pad 1.68)
  other vias: 13.97,14.61
N$213  (via drill 0.6 pad 1.68)
  other vias: 13.97,12.06
N$215  (via drill 0.6 pad 1.68)
  other vias: 11.43,55.24
N$216  (via drill 0.6 pad 1.68)
  other vias: 11.43,52.7
N$217  (via drill 0.6 pad 1.68)
  other vias: 11.43,50.16
N$218  (via drill 0.6 pad 1.68)
  other vias: 11.43,47.62
N$219  (via drill 0.6 pad 1.68)
  other vias: 11.43,45.09
N$220  (via drill 0.6 pad 1.68)
  other vias: 11.43,42.55
N$221  (via drill 0.6 pad 1.68)
  other vias: 11.43,40.01
N$222  (via drill 0.6 pad 1.68)
  other vias: 11.43,37.47
N$223  (via drill 0.6 pad 1.68)
  other vias: 11.43,34.92
N$224  (via drill 0.6 pad 1.68)
  other vias: 11.43,32.38
N$227  (via drill 0.6 pad 1.68)
  other vias: 11.43,24.77
N$228  (via drill 0.6 pad 1.68)
  other vias: 11.43,22.23
N$229  (via drill 0.6 pad 1.68)
  other vias: 11.43,19.68
N$230  (via drill 0.6 pad 1.68)
  other vias: 11.43,17.14
N$231  (via drill 0.6 pad 1.68)
  other vias: 11.43,14.61
N$232  (via drill 0.6 pad 1.68)
  other vias: 11.43,12.06
N$234  (via drill 0.6 pad 1.68)
  other vias: 8.89,55.24
N$235  (via drill 0.6 pad 1.68)
  other vias: 8.89,52.7
N$236  (via drill 0.6 pad 1.68)
  other vias: 8.89,50.16
N$237  (via drill 0.6 pad 1.68)
  other vias: 8.89,47.62
N$238  (via drill 0.6 pad 1.68)
  other vias: 8.89,45.09
N$239  (via drill 0.6 pad 1.68)
  other vias: 8.89,42.55
N$240  (via drill 0.6 pad 1.68)
  other vias: 8.89,40.01
N$241  (via drill 0.6 pad 1.68)
  other vias: 8.89,37.47
N$242  (via drill 0.6 pad 1.68)
  other vias: 8.89,34.92
N$243  (via drill 0.6 pad 1.68)
  other vias: 8.89,32.38
N$246  (via drill 0.6 pad 1.68)
  other vias: 8.89,24.77
N$247  (via drill 0.6 pad 1.68)
  other vias: 8.89,22.23
N$248  (via drill 0.6 pad 1.68)
  other vias: 8.89,19.68
N$249  (via drill 0.6 pad 1.68)
  other vias: 8.89,17.14
N$250  (via drill 0.6 pad 1.68)
  other vias: 8.89,14.61
N$251  (via drill 0.6 pad 1.68)
  other vias: 8.89,12.06
N$252
  Bottom 0.61: IC11.4 R10.1
N$253
  Bottom 0.406: IC11.7 R11.1
N$255
  Bottom 0.406: IC11.28 102.87,73.03 R12.1
PB0
  Bottom 0.406: IC4.18 JP4.18
PB1
  Bottom 0.406: IC4.19 JP4.20
PB2
  Bottom 0.406: IC4.20 JP4.22
PB3
  Bottom 0.406: IC4.21 73.34,32.38 72.07,33.66 44.45,33.66 JP4.21
PB4
  Bottom 0.406: IC4.22 73.34,34.92 72.07,36.2 44.45,36.2 JP4.19
PB5
  Bottom 0.406: IC4.23 73.34,37.47 72.07,38.73 44.45,38.73 JP4.17
PC0
  Bottom 0.406: IC4.14 JP4.10
PC1
  Bottom 0.406: IC4.15 JP4.12
PC2
  Bottom 0.406: IC4.16 JP4.14
PC3
  Bottom 0.406: IC4.17 JP4.16
PC4
  Bottom 0.406: IC4.13 JP4.8
PC5
  Bottom 0.406: IC4.12 JP4.6
PC6
  Bottom 0.406: IC4.11 JP4.4
PC7
  Bottom 0.406: IC4.10 JP4.2
RD  (via drill 0.6 pad 1.42)
  Top 0.406: v66.36,30.16 v66.36,70.48 | v68.9,27.62 v82.23,27.62
  Bottom 0.406: v66.36,70.48 IC4.5 | SV1.33 140.34,46.35 142.56,46.35 143.19,45.72 143.19,20 134.3,11.11 97.47,11.11 82.23,26.35 v82.23,27.62 | CON1.34 v68.9,27.62 68.9,29.53 68.26,30.16 v66.36,30.16
RST  (via drill 0.6 pad 1.42)
  Top 0.406: v62.23,26.35 v80.96,26.35 | v93.66,55.24 v93.66,83.19 | v100.33,55.24 v100.33,9.84
  Bottom 0.406: CON1.41 60.01,24.13 v62.23,26.35 | v100.33,55.24 v93.66,55.24 IC11.8 | v80.96,26.35 97.47,9.84 v100.33,9.84 134.3,9.84 144.15,19.68 144.15,50.48 143.19,51.44 140.34,51.44 SV1.29 135.89,52.7 130.81,47.62 U1.4
  Bottom 0.61: IC8.5 v93.66,83.19
RST_INV  (via drill 0.6 pad 1.42)
  Top 0.406: v81.93,79.38 v81.93,67.94
  Bottom 0.406: IC4.35 v81.93,67.94 | v81.93,79.38 88.9,79.38 90.17,80.64 IC8.6
RW
  Bottom 0.406: SV1.36 140.34,43.81 133.99,43.81 128.27,38.1 114.94,38.1 113.03,40.01 U1.28 110.49,40.01 109.22,41.27 104.14,41.27 102.87,42.55 IC11.13
S$1  (via drill 0.6 pad 1.68)
  other vias: 8.89,27.3
S$2  (via drill 0.6 pad 1.68)
  other vias: 11.43,27.3
S$3  (via drill 0.6 pad 1.68)
  other vias: 13.97,27.3
S$4  (via drill 0.6 pad 1.68)
  other vias: 16.51,27.3
S$5  (via drill 0.6 pad 1.68)
  other vias: 19.05,27.3
S$6  (via drill 0.6 pad 1.68)
  other vias: 21.59,27.3
S$7  (via drill 0.6 pad 1.68)
  other vias: 24.13,27.3
S$8  (via drill 0.6 pad 1.68)
  other vias: 21.59,29.84
S$9  (via drill 0.6 pad 1.68)
  other vias: 24.13,29.84
S$10  (via drill 0.6 pad 1.68)
  other vias: 26.67,29.84
S$11  (via drill 0.6 pad 1.68)
  other vias: 29.21,29.84
S$12  (via drill 0.6 pad 1.68)
  other vias: 31.75,29.84
S$13  (via drill 0.6 pad 1.68)
  other vias: 34.29,29.84
S$14  (via drill 0.6 pad 1.68)
  other vias: 8.89,29.84
S$15  (via drill 0.6 pad 1.68)
  other vias: 11.43,29.84
S$16  (via drill 0.6 pad 1.68)
  other vias: 13.97,29.84
S$17  (via drill 0.6 pad 1.68)
  other vias: 16.51,29.84
S$18  (via drill 0.6 pad 1.68)
  other vias: 19.05,29.84
STEP1  (via drill 0.6 pad 1.42)
  Top 0.406: v63.82,66.67 v63.82,87
  Bottom 0.406: IC1.6 66.04,99.69 64.77,98.42 64.77,94.93 63.82,93.98 v63.82,87 IC1.1 | IC11.3 88.9,67.94 87.63,66.67 v63.82,66.67
STEP2  (via drill 0.6 pad 1.42)
  Top 0.406: v40.64,56.52 v40.64,66.04
  Bottom 0.406: IC3.1 v40.64,66.04 40.64,73.34 41.59,74.3 41.59,77.79 42.55,78.74 IC3.6 | IC11.6 88.9,60.33 87.63,61.59 84.77,61.59 80.64,57.47 76.2,57.47 75.25,56.52 v40.64,56.52
TIMER_CS  (via drill 0.6 pad 1.42)
  Top 0.406: v103.19,40.01 v103.19,30.48
  Bottom 0.406: IC6.14 v103.19,30.48
  Bottom 0.61: IC11.15 v103.19,40.01
UART_CLK  (via drill 0.6 pad 1.42)
  Top 0.406: v134.62,57.47 v134.62,39.05
  Bottom 0.406: U1.6 129.86,52.7 v134.62,57.47 | v134.62,39.05 134.62,35.24 QG1.8
UART_CS  (via drill 0.6 pad 1.42)
  Top 0.406: v116.2,45.09 v116.2,27.94
  Bottom 0.406: U1.3 v116.2,45.09 | v116.2,27.94 IC6.13
VCC  (via drill 0.6 pad 1.42, 0.6 pad 1.68)
  Top 0.406: v118.11,42.55 v118.11,32.07 | v98.42,40.01 v98.42,43.81 | v113.67,86.36 v104.78,86.36
  Top 0.61: v80.01,73.66 v80.01,45.09 | v77.79,98.42 v77.79,73.66 | v48.26,85.09 v48.26,29.43 | v96.52,93.34 v96.52,67.63 | v96.52,65.41 v96.52,40.01
  Bottom 0.406: R9.2 116.2,24.13 118.11,26.04 v118.11,32.07 | R7.1 v118.11,42.55 | CON1.38 63.82,28.47 | 64.45,26.25 | R6.2 70.8,29.53 69,31.33 65.62,31.33 64.45,30.16 64.45,28.57 | 64.45,26.25 64.45,26.99 | 64.45,26.99 64.45,28.57 | C7.2 63.82,28.47 | 63.82,28.47 64.35,28.47 64.45,28.57 | CON1.13 64.45,26.25 | R3.2 64.56,26.89 64.45,26.99 | 69.22,97.16 IC1.5 | 76.2,98.42 v77.79,98.42 | IC7.13 56.83,78.74 55.56,77.47 52.7,77.47 | IC3.5 45.72,76.2 | 69.22,97.16 69.22,92.71 68.58,92.08 IC1.3 | IC1.7 68.26,102.23 69.53,100.97 76.2,100.97 | 76.2,100.97 76.2,98.42 | 76.2,100.97 76.2,102.87 75.56,103.5 69.53,103.5 68.26,104.78 IC1.8 | 69.22,97.16 C13.1 | C13.1 | 76.2,98.42 72.07,98.42 C13.1 | 45.72,76.2 45.72,71.75 45.09,71.12 IC3.3 | 45.72,76.2 C15.1 48.58,77.47 52.7,77.47 | IC3.7 44.77,81.28 46.04,80.01 52.7,80.01 | 52.7,80.01 52.7,77.47 | IC3.8 44.77,83.82 46.04,82.55 52.07,82.55 52.7,81.92 52.7,80.01 | C6.2 v113.67,86.36
  Bottom 0.61: C14.1 | C7.2 60.43,28.47 59.48,29.43 R4.2 R5.2 v48.26,29.43 | R8.2 v98.42,43.81 | IC4.26 C11.1 v80.01,45.09 | R10.2 v96.52,65.41 | C8.1 IC8.14 | IC1.2 IC1.3 | v77.79,98.42 78.74,98.42 80.01,99.69 IC5.13 | IC3.2 IC3.3
  Bottom 0.813: 93.98,111.76 123.19,111.76 126.97,107.97 C14.1 | 93.98,111.76 81.6,111.76 | QG1.14 C1.1 | U1.15 111.44,76.52 104.78,83.19 v104.78,86.36 104.78,93.34 | 104.78,93.34 104.78,97.16 102.87,99.06 95.89,99.06 93.98,100.97 93.98,111.76 | v96.52,93.34 IC8.14 104.78,93.34 | v77.79,73.66 v80.01,73.66 | IC5.13 IC5.14 | IC7.13 IC7.14 | IC7.14 56.52,81.28 52.7,85.09 50.8,85.09 | IC5.14 C9.1 | IC7.14 C12.1 | IC5.14 81.6,111.76 | 50.8,85.09 50.8,109.22 52.7,111.76 81.6,111.76 | 50.8,85.09 v48.26,85.09 | v96.52,67.63 v96.52,65.41 R11.2 R12.2 | v26.67,27.3 v29.21,27.3 v31.75,27.3 v34.29,27.3 C20.+ 48.26,27.31 v48.26,29.43
  Bottom 1.016: R1.2 QG1.14 v118.11,32.07 114.62,32.07 111.12,35.56 IC6.16 105.09,35.56 100.65,40.01 v98.42,40.01 v96.52,40.01 IC11.14 C3.1 | U1.15 C2.1 | IC2.16 C14.1
  Bottom 1.27: IC11.14 | 129.36,97.79 C10.+ 137.16,97.79 139.06,99.69 JP3.2 | 129.36,97.79 129.35,97.79 | 129.36,97.79 C14.1
VMOT
  Bottom 0.61: IC13.10 C19.1 | C18.1 IC12.10
  Bottom 1.016: X4.5 17.14,81.28 19.37,83.5 19.37,85.09 20.64,86.36 IC12.10 C16.+ X5.1 C17.+ X3.5 40.64,102.23 42.86,104.46 42.86,106.05 44.13,107.31 IC13.10
WR  (via drill 0.6 pad 1.42)
  Top 0.406: v67.63,41.27 v67.63,28.89 | v65.09,69.22 v65.09,41.27
  Bottom 0.406: SV1.34 140.34,48.9 133.99,48.9 131.44,46.35 102.23,46.35 100.97,45.09 95.25,45.09 93.98,43.81 74.93,43.81 72.39,41.27 v67.63,41.27 v65.09,41.27 | IC4.36 73.66,70.48 72.39,69.22 v65.09,69.22 | CON1.35 v67.63,28.89